# Altium PCB PCB1.PcbDoc
Units mm, origin at the board's own origin, x right, y up, seen from the top; angles counter-clockwise.
Board outline 220 x 125 mm, 4 copper layers (Top Layer 1, Layer 1, Layer 2, Bottom Layer), stack 0.746 mm thick; 119 components, 85 nets, 372 pads, 627 vias.
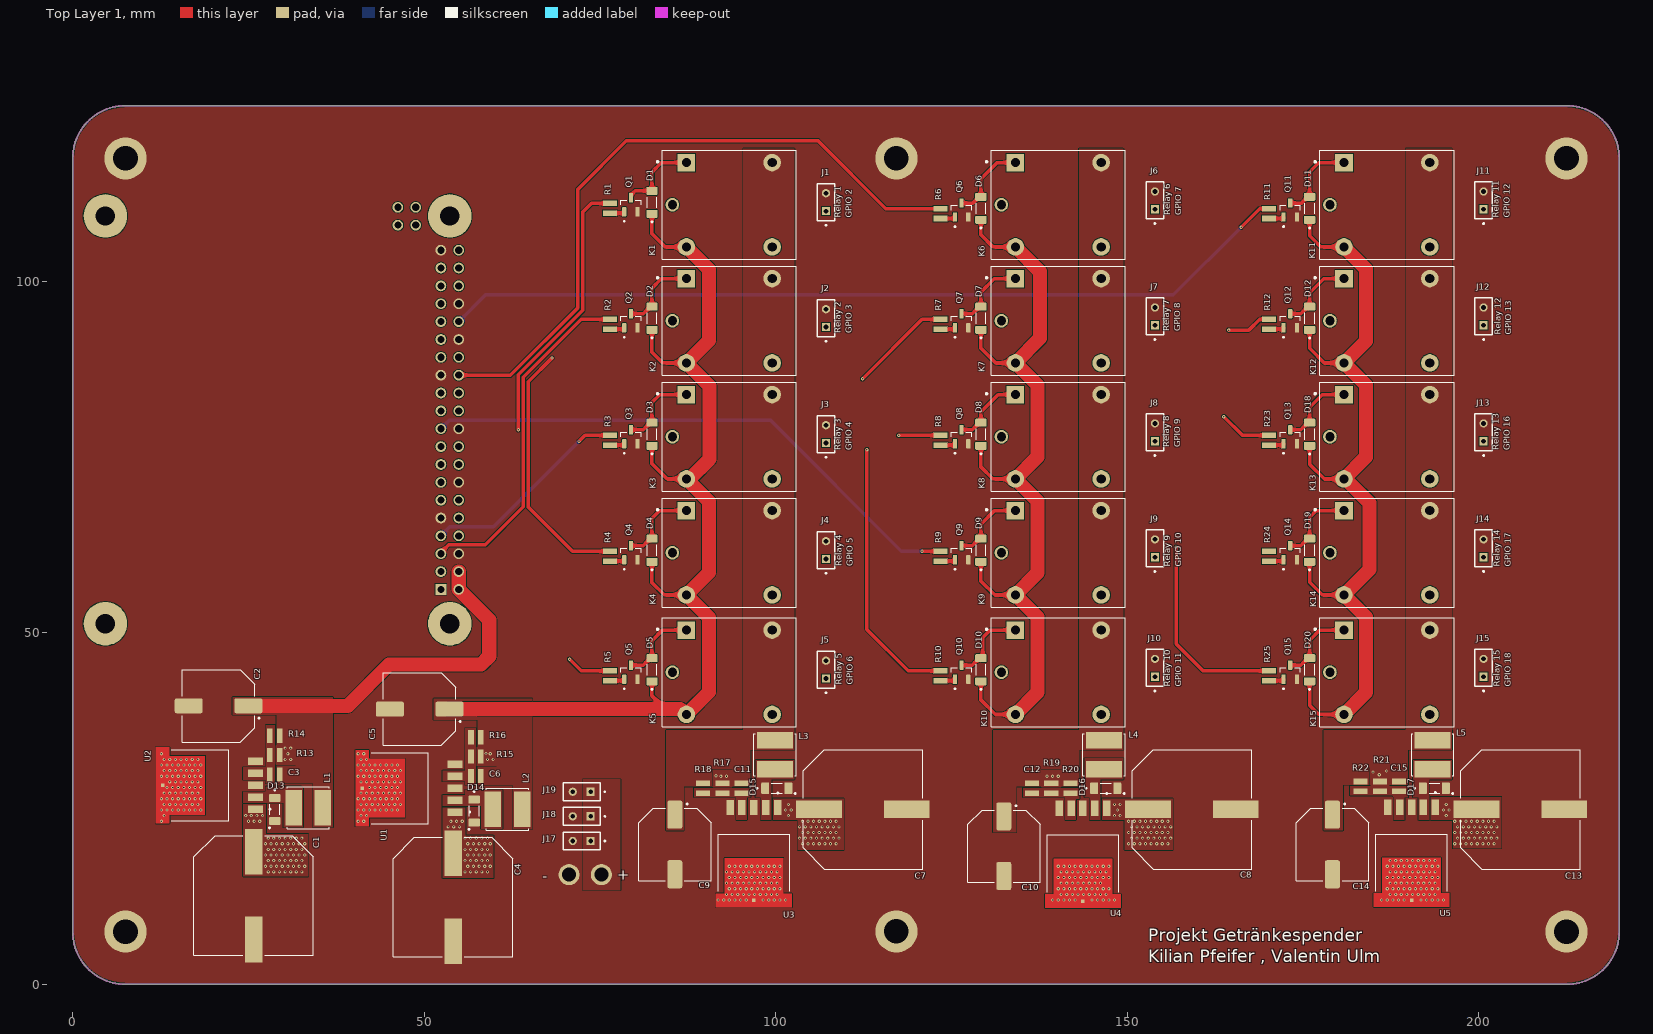
[diagram p0: Top Layer 1 view]
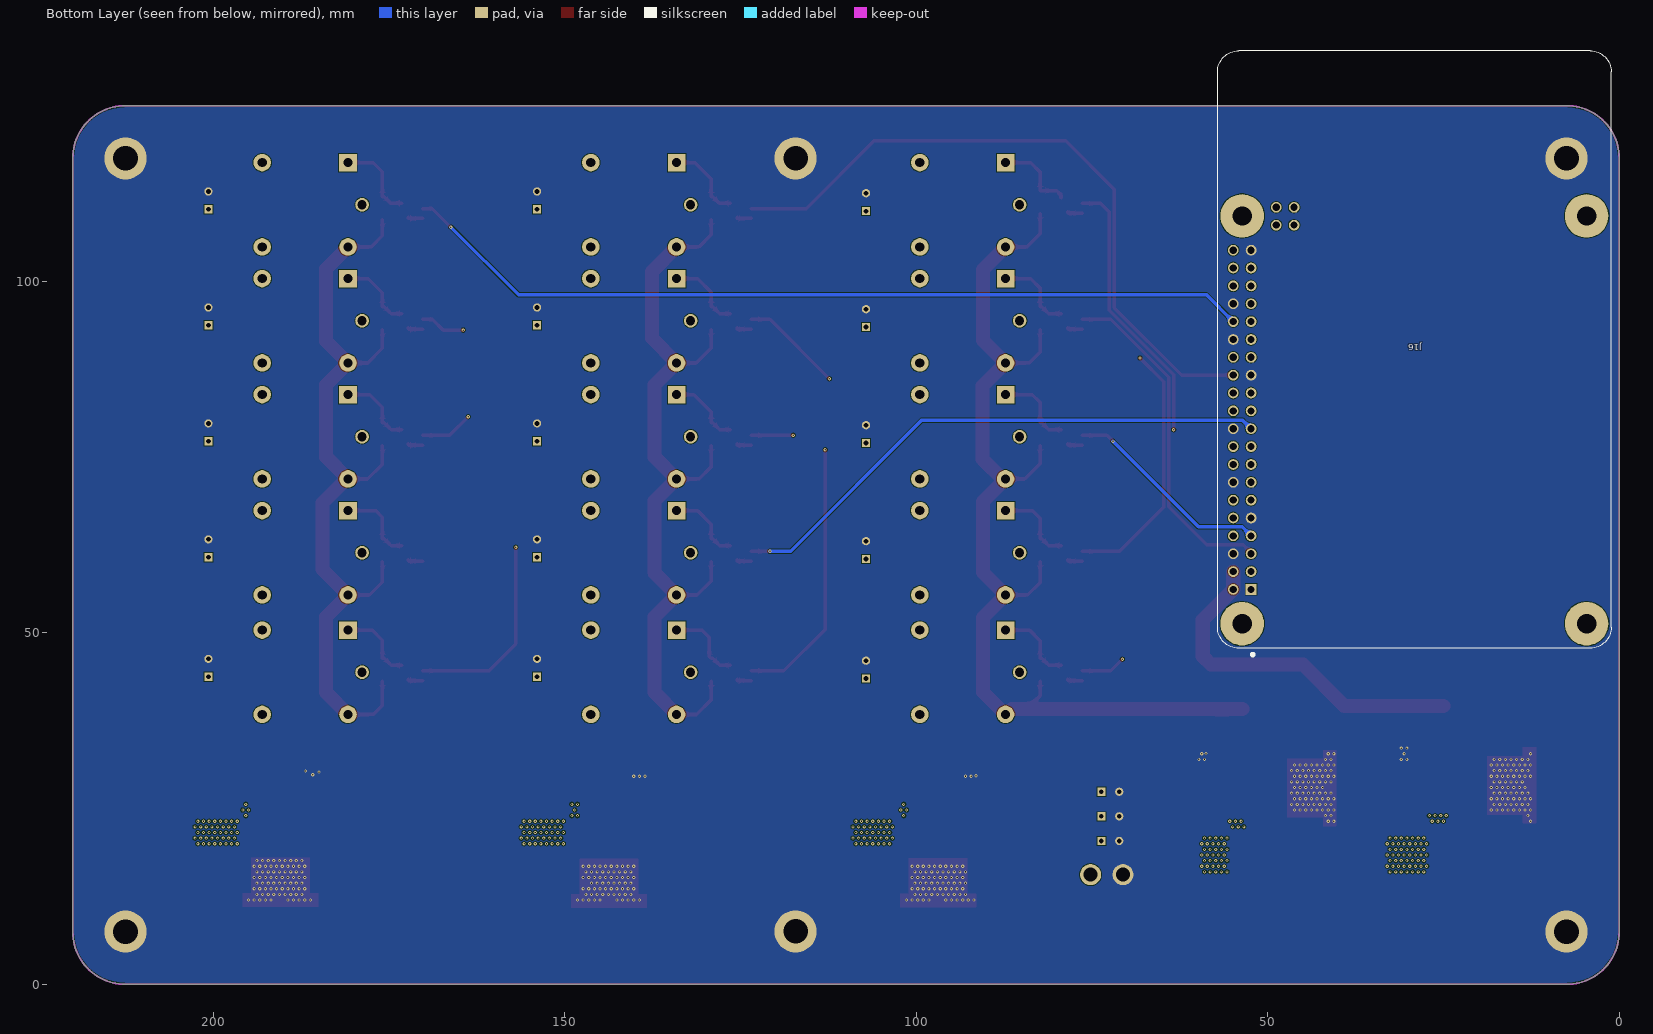
[diagram p1: Bottom Layer view, seen from below]
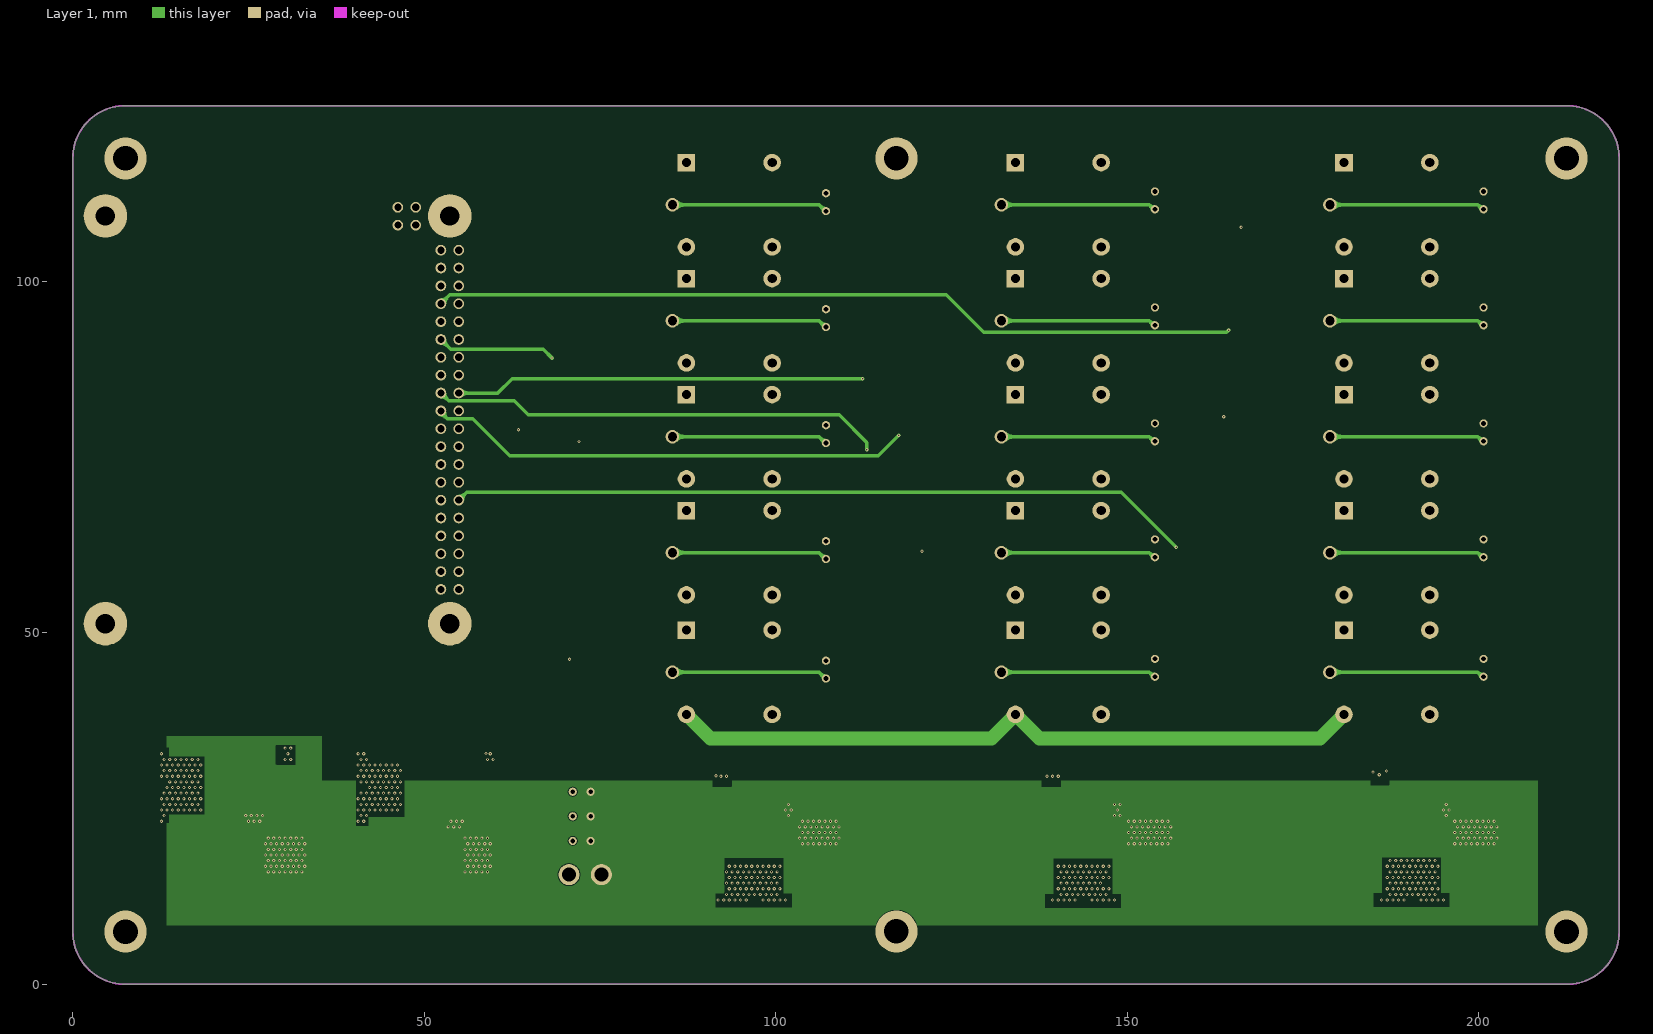
[diagram p2: Layer 1]
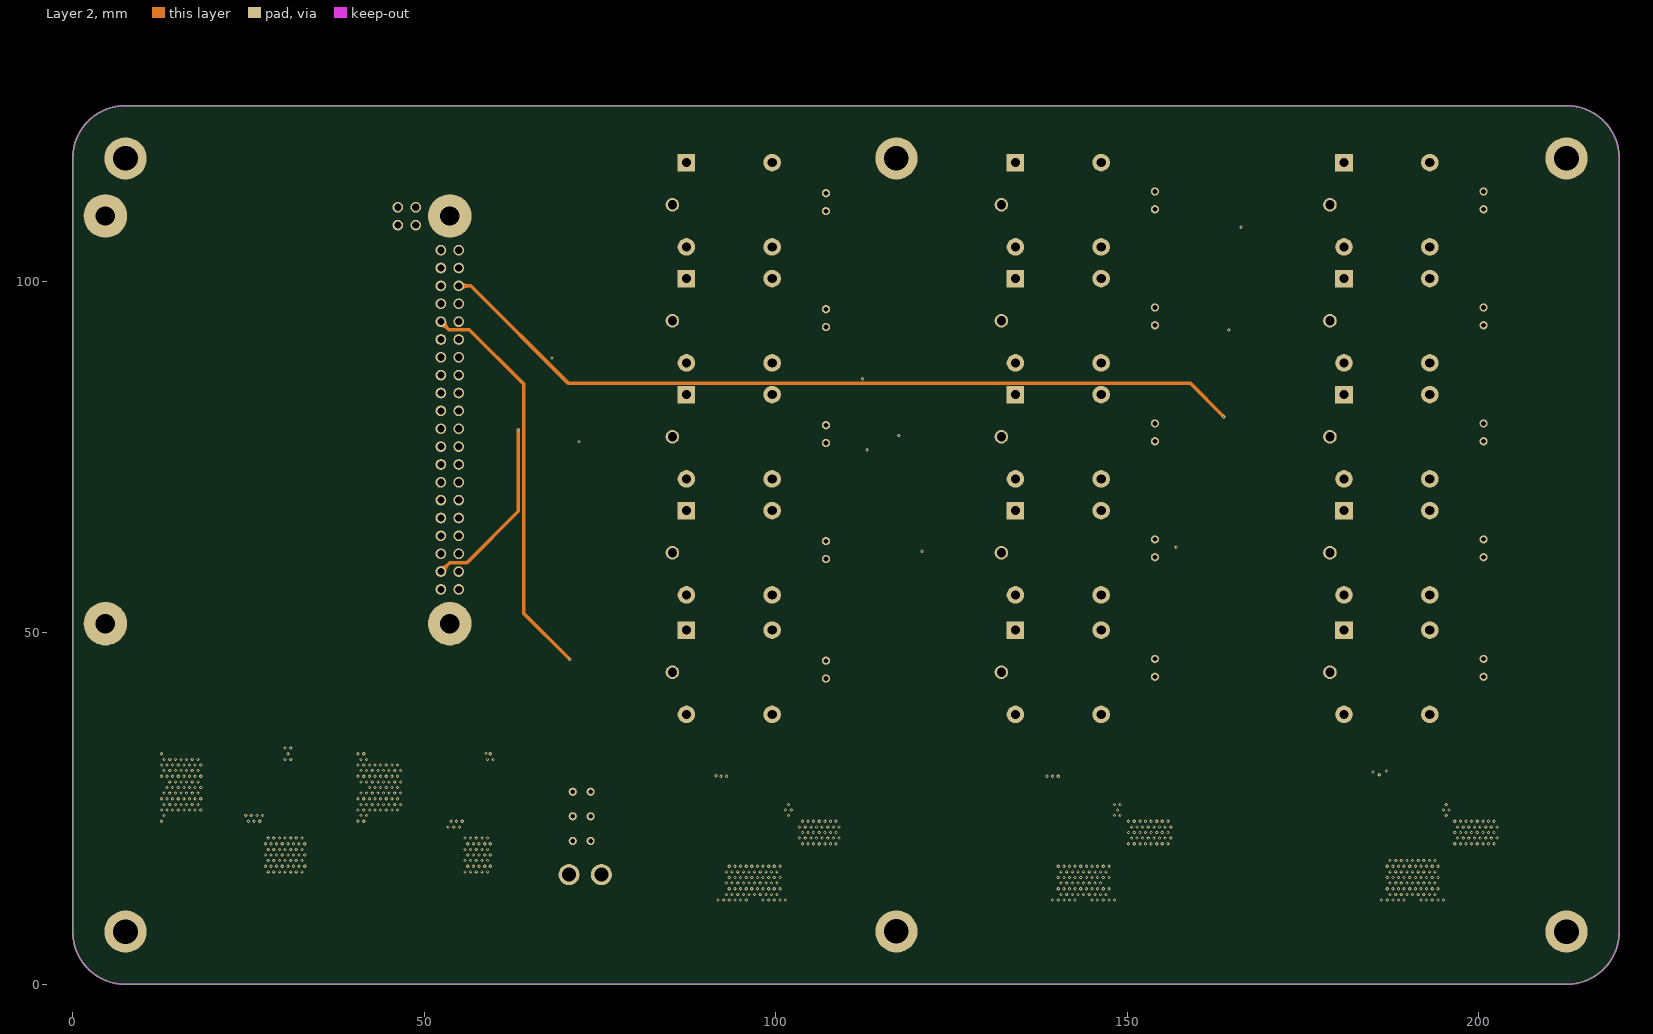
[diagram p3: Layer 2]
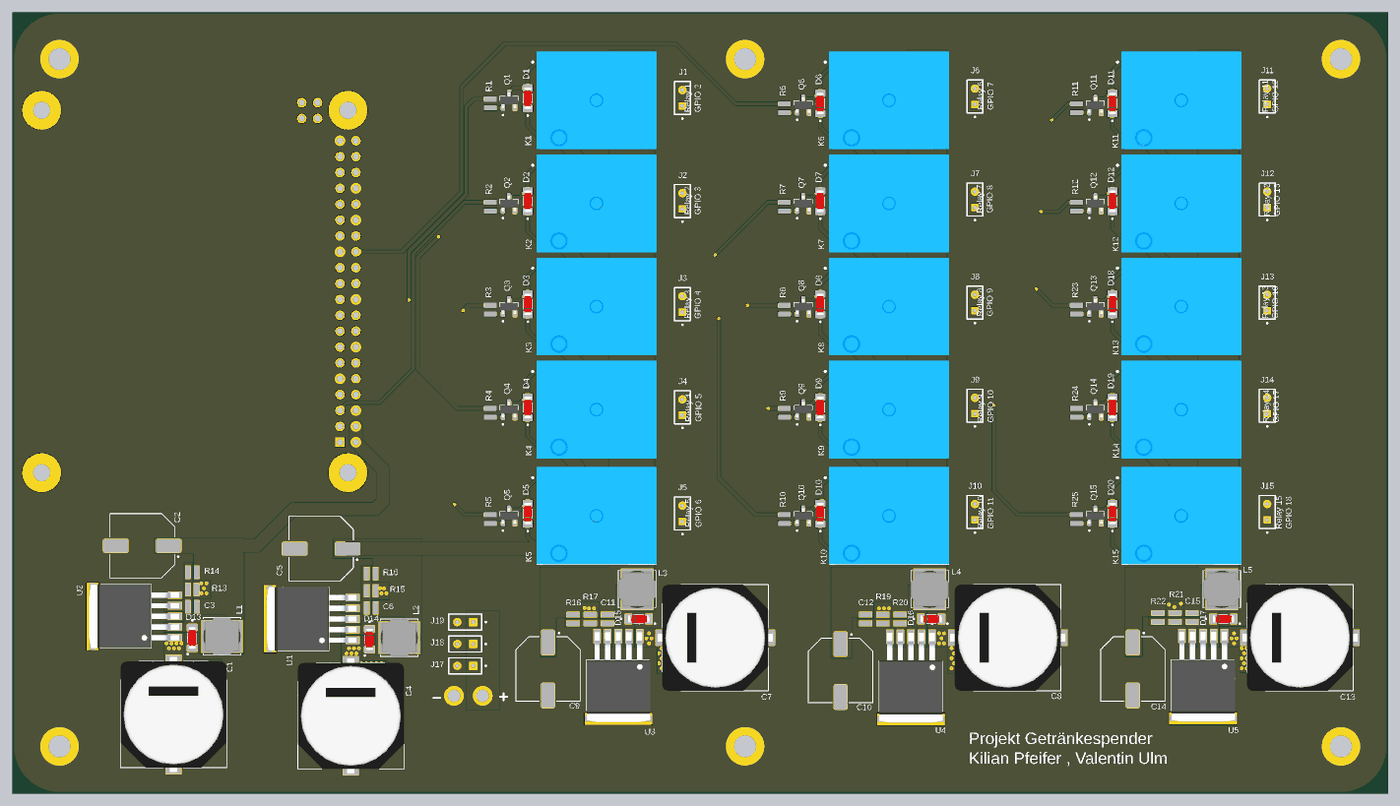
[diagram p4: 3D render of the assembled board from above, using the file's embedded part models]

## Layer stack, top to bottom
Top Solder: solder mask 0.0102, Solder Resist, Dk 3.5
Top Layer 1: signal copper 0.035
Dielectric 2: prepreg 0.0711, PP-006, Dk 4.1
Dielectric 3: prepreg 0.0711, PP-006, Dk 4.1
Layer 1: signal copper 0.0356
Dielectric 1: dielectric 0.32, FR-4, Dk 4.8
Layer 2: signal copper 0.0356
Dielectric 4: prepreg 0.0711, PP-006, Dk 4.1
Dielectric 5: prepreg 0.0711, PP-006, Dk 4.1
Bottom Layer: signal copper 0.035
Bottom Solder: solder mask 0.0102, Solder Resist, Dk 3.5

## Board outline
0,7.5 ccw(c7.5,7.5) 7.5,0 212.5,0 ccw(c212.5,7.5) 220,7.5 220,117.5 ccw(c212.5,117.5) 212.5,125 7.5,125 ccw(c7.5,117.5) 0,117.5

## Design rules (kind name [scope] priority, off if disabled: settings)
BoardOutlineClearance [All] p1: gap=0.2 ignorepadtopadclearanceinfootprint=FALSE
Clearance [All] p1: gap=0.102 ignorepadtopadclearanceinfootprint=FALSE except(0.127: Arc-Via Track-Via SMDPad-Via THPad-Via Via-Via Via-Fill Via-Poly Via-Region Via-Text; 0.25: Arc-Hole Track-Hole SMDPad-Hole THPad-Hole Via-Hole Fill-Hole Poly-Hole Region-Hole Text-Hole)
ComponentClearance [All] p1: gap=0.102 collisioncheckmode=3 verticalgap=0.102 showdistances=TRUE
DiffPairsRouting [All] p1: maxlimit=0.102 minlimit=0.102 mostfreqgap=0.102 toplayer_minwidth=0.102 toplayer_maxwidth=1816.048 toplayer_prefwidth=0.102 midlayer2_minwidth=0.102 midlayer2_maxwidth=1816.048 midlayer2_prefwidth=0.102 midlayer3_minwidth=0.102 midlayer3_maxwidth=1816.048 midlayer3_prefwidth=0.102 bottomlayer_minwidth=0.102 bottomlayer_maxwidth=1816.048 bottomlayer_prefwidth=0.102 maxuncoupledlength=12.7
Height [All] p1: minheight=0 maxheight=1816.048 prefheight=12.7
HoleSize [All] p1: absolutevalues=TRUE maxlimit=6.3 minlimit=0.2 maxpercent=80.000 minpercent=20.000
HoleToHoleClearance [All] p1: gap=0.25 allowstackedmicrovias=FALSE
MinimumAnnularRing [All] p1: minimumring=0.076
MinimumSolderMaskSliver [All] p1: minsoldermaskwidth=0
PlaneClearance [All] p1: clearance=0.102
PlaneConnect PlaneConnectPowerPads [InPadClass('PowerPads')] p1: planeconnectstyle=Direct reliefexpansion=0.508 reliefentries=4 reliefconductorwidth=0.254 reliefairgap=0.254
PlaneConnect [All] p2: pad.planeconnectstyle=Relief pad.reliefexpansion=0.3 pad.reliefentries=4 pad.reliefconductorwidth=0.102 pad.reliefairgap=0.102 via.planeconnectstyle=Direct via.reliefexpansion=0.3 via.reliefentries=4 via.reliefconductorwidth=0.127 via.reliefairgap=0.127
PolygonConnect PolygonConnectPowerPads [All vs (InPadClass('PowerPads'))] p1: connectstyle=Direct reliefconductorwidth=0.254 reliefentries=4 polygonreliefangle="90 Angle" airgapwidth=0.254
PolygonConnect [All] p2: connectstyle=Direct reliefconductorwidth=0.102 reliefentries=4 polygonreliefangle="90 Angle" airgapwidth=0.102
RoutingVias [All] p1: holewidth=0.2 width=0.45 viastyle="Through Hole" minholewidth=0.2 minwidth=0.45 maxholewidth=6.3 maxwidth=6.55
SilkToSilkClearance [All] p1: silktosilkclearance=0
SilkToSolderMaskClearance [IsPad] p1: minsilkscreentomaskgap=0.102 clearancetoexposedcopper=TRUE
SolderMaskExpansion [All] p1: expansion=0.075 istentingtop=FALSE
Width [All] p1: maxlimit=1816.048 minlimit=0.102 preferedwidth=0.5
20 further rules are at their usual default settings.

## Classes and differential pairs
component class Relay: D1 D2 D3 D4 D5 D6 D7 D8 D9 D10 D11 D12 D18 D19 D20 J1 J2 J3 J4 J5 J6 J7 J8 J9 J10 J11 J12 J13 J14 J15 K1 K2 K3 K4 K5 K6 K7 K8 K9 K10 K11 K12 K13 K14 K15 Q1 Q2 Q3 Q4 Q5 Q6 Q7 Q8 Q9 Q10 Q11 Q12 Q13 Q14 Q15 R1 R2 R3 R4 R5 R6 R7 R8 R9 R10 R11 R12 R23 R24 R25
component class Relay_2+Pi: J16 J17 J18 J19
component class Buck-converter: C1 C2 C3 C4 C5 C6 C7 C8 C9 C10 C11 C12 C13 C14 C15 D13 D14 D15 D16 D17 L1 L2 L3 L4 L5 R13 R14 R15 R16 R17 R18 R19 R20 R21 R22 U1 U2 U3 U4 U5

## Components (designator, comment, footprint, x,y, rotation, side; value= is the part's Value field where it differs from the comment)
C1 "Cap" CAP_EEEFK1H471AM 25.735,12.618 r270 top value=470uF
C2 "Cap" CAPAE1030X1080N_UWT1H221MNL1GS 20.735,39.618 r180 top value=220uF
C3 "Cap" RES_ERJB3CFR15V 28.735,29.868 r0 top value=680uF
C4 "Cap" CAP_EEEFK1H471AM 54.1,12.4 r270 top value=470uF
C5 "Cap" CAPAE1030X1080N_UWT1H221MNL1GS 49.35,39.15 r180 top value=220uF
C6 "Cap" RES_ERJB3CFR15V 57.35,29.65 r0 top value=680uF
C7 "Cap" CAP_EEEFK1H471AM 112.4,24.9 r0 top value=470uF
C8 "Cap" CAP_EEEFK1H471AM 159.2,24.9 r0 top value=470uF
C9 "Cap" CAPAE1030X1080N_UWT1H221MNL1GS 85.65,19.9 r270 top value=220uF
C10 "Cap" CAPAE1030X1080N_UWT1H221MNL1GS 132.45,19.65 r270 top value=220uF
C11 "Cap" RES_ERJB3CFR15V 95.15,27.9 r90 top value=680uF
C12 "Cap" RES_ERJB3CFR15V 136.45,27.9 r90 top value=680uF
C13 "Cap" CAP_EEEFK1H471AM 205.95,24.9 r0 top value=470uF
C14 "Cap" CAPAE1030X1080N_UWT1H221MNL1GS 179.2,19.9 r270 top value=220uF
C15 "Cap" RES_ERJB3CFR15V 188.7,28.15 r90 top value=680uF
D1 "FDLL4148" DIOMELF3414N 82.4,111.255 r90 top
D2 "FDLL4148" DIOMELF3414N 82.4,94.755 r90 top
D3 "FDLL4148" DIOMELF3414N 82.4,78.255 r90 top
D4 "FDLL4148" DIOMELF3414N 82.4,61.755 r90 top
D5 "FDLL4148" DIOMELF3414N 82.4,44.755 r90 top
D6 "FDLL4148" DIOMELF3414N 129.2,110.4 r90 top
D7 "FDLL4148" DIOMELF3414N 129.2,94.755 r90 top
D8 "FDLL4148" DIOMELF3414N 129.2,78.255 r90 top
D9 "FDLL4148" DIOMELF3414N 129.2,61.755 r90 top
D10 "FDLL4148" DIOMELF3414N 129.2,44.755 r90 top
D11 "FDLL4148" DIOMELF3414N 175.95,110.4 r90 top
D12 "FDLL4148" DIOMELF3414N 175.95,94.755 r90 top
D13 "FDLL4148" DIOMELF3414N 28.735,24.868 r270 top
D14 "FDLL4148" DIOMELF3414N 57.1,24.65 r270 top
D15 "FDLL4148" DIOMELF3414N 100.15,27.9 r0 top
D16 "FDLL4148" DIOMELF3414N 146.95,27.9 r0 top
D17 "FDLL4148" DIOMELF3414N 193.7,27.9 r0 top
D18 "FDLL4148" DIOMELF3414N 175.95,78.255 r90 top
D19 "FDLL4148" DIOMELF3414N 175.95,61.755 r90 top
D20 "FDLL4148" DIOMELF3414N 175.95,44.755 r90 top
J1 "BBS-102-T-A" SAMTEC_BBS-102-T-A 107.15,111.275 r90 top
J2 "BBS-102-T-A" SAMTEC_BBS-102-T-A 107.15,94.775 r90 top
J3 "BBS-102-T-A" SAMTEC_BBS-102-T-A 107.15,78.275 r90 top
J4 "BBS-102-T-A" SAMTEC_BBS-102-T-A 107.15,61.775 r90 top
J5 "BBS-102-T-A" SAMTEC_BBS-102-T-A 107.15,44.775 r90 top
J6 "BBS-102-T-A" SAMTEC_BBS-102-T-A 153.95,111.525 r90 top
J7 "BBS-102-T-A" SAMTEC_BBS-102-T-A 153.95,95.025 r90 top
J8 "BBS-102-T-A" SAMTEC_BBS-102-T-A 153.95,78.525 r90 top
J9 "BBS-102-T-A" SAMTEC_BBS-102-T-A 153.95,62.025 r90 top
J10 "BBS-102-T-A" SAMTEC_BBS-102-T-A 153.95,45.025 r90 top
J11 "BBS-102-T-A" SAMTEC_BBS-102-T-A 200.7,111.525 r90 top
J12 "BBS-102-T-A" SAMTEC_BBS-102-T-A 200.7,95.025 r90 top
J13 "BBS-102-T-A" SAMTEC_BBS-102-T-A 200.7,78.525 r90 top
J14 "BBS-102-T-A" SAMTEC_BBS-102-T-A 200.7,62.025 r90 top
J15 "BBS-102-T-A" SAMTEC_BBS-102-T-A 200.7,45.025 r90 top
J16 "SBH11-PBPC-D20-RA-BK" MODULE_RASPBERRY_PI_3_MODEL_B+ 29.143,90.31 r90 bottom
J17 "BBS-102-T-A" SAMTEC_BBS-102-T-A 72.4,20.4 r180 top
J18 "BBS-102-T-A" SAMTEC_BBS-102-T-A 72.4,23.9 r180 top
J19 "BBS-102-T-A" SAMTEC_BBS-102-T-A 72.4,27.4 r180 top
K1 "SRD-05VDC-SL-C" RELAY_SRD-05VDC-SL-C 93.4,110.9 r0 top
K2 "SRD-05VDC-SL-C" RELAY_SRD-05VDC-SL-C 93.4,94.4 r0 top
K3 "SRD-05VDC-SL-C" RELAY_SRD-05VDC-SL-C 93.4,77.9 r0 top
K4 "SRD-05VDC-SL-C" RELAY_SRD-05VDC-SL-C 93.4,61.4 r0 top
K5 "SRD-05VDC-SL-C" RELAY_SRD-05VDC-SL-C 93.4,44.4 r0 top
K6 "SRD-05VDC-SL-C" RELAY_SRD-05VDC-SL-C 140.2,110.9 r0 top
K7 "SRD-05VDC-SL-C" RELAY_SRD-05VDC-SL-C 140.2,94.4 r0 top
K8 "SRD-05VDC-SL-C" RELAY_SRD-05VDC-SL-C 140.2,77.9 r0 top
K9 "SRD-05VDC-SL-C" RELAY_SRD-05VDC-SL-C 140.2,61.4 r0 top
K10 "SRD-05VDC-SL-C" RELAY_SRD-05VDC-SL-C 140.2,44.4 r0 top
K11 "SRD-05VDC-SL-C" RELAY_SRD-05VDC-SL-C 186.95,110.9 r0 top
K12 "SRD-05VDC-SL-C" RELAY_SRD-05VDC-SL-C 186.95,94.4 r0 top
K13 "SRD-05VDC-SL-C" RELAY_SRD-05VDC-SL-C 186.95,77.9 r0 top
K14 "SRD-05VDC-SL-C" RELAY_SRD-05VDC-SL-C 186.95,61.4 r0 top
K15 "SRD-05VDC-SL-C" RELAY_SRD-05VDC-SL-C 186.95,44.4 r0 top
L1 "MLF2012C680KT000" IND_SRN6045TA-680M 33.485,25.118 r0 top
L2 "MLF2012C680KT000" IND_SRN6045TA-680M 61.85,24.9 r0 top
L3 "MLF2012C680KT000" IND_SRN6045TA-680M 99.9,32.65 r90 top
L4 "MLF2012C680KT000" IND_SRN6045TA-680M 146.7,32.65 r90 top
L5 "MLF2012C680KT000" IND_SRN6045TA-680M 193.45,32.65 r90 top
Q1 "BC817-40" SOT95P240X120-3N 79.4,110.9 r90 top
Q2 "BC817-40" SOT95P240X120-3N 79.4,94.4 r90 top
Q3 "BC817-40" SOT95P240X120-3N 79.4,77.9 r90 top
Q4 "BC817-40" SOT95P240X120-3N 79.4,61.4 r90 top
Q5 "BC817-40" SOT95P240X120-3N 79.4,44.4 r90 top
Q6 "BC817-40" SOT95P240X120-3N 126.45,110.15 r90 top
Q7 "BC817-40" SOT95P240X120-3N 126.45,94.4 r90 top
Q8 "BC817-40" SOT95P240X120-3N 126.45,77.9 r90 top
Q9 "BC817-40" SOT95P240X120-3N 126.45,61.4 r90 top
Q10 "BC817-40" SOT95P240X120-3N 126.45,44.4 r90 top
Q11 "BC817-40" SOT95P240X120-3N 173.2,110.15 r90 top
Q12 "BC817-40" SOT95P240X120-3N 173.2,94.4 r90 top
Q13 "BC817-40" SOT95P240X120-3N 173.2,77.9 r90 top
Q14 "BC817-40" SOT95P240X120-3N 173.2,61.4 r90 top
Q15 "BC817-40" SOT95P240X120-3N 173.2,44.4 r90 top
R1 "ERJB3CFR15V" RES_ERJB3CFR15V 76.4,110.4 r90 top value=1k
R2 "ERJB3CFR15V" RES_ERJB3CFR15V 76.4,93.9 r90 top value=1k
R3 "ERJB3CFR15V" RES_ERJB3CFR15V 76.4,77.4 r90 top value=1k
R4 "ERJB3CFR15V" RES_ERJB3CFR15V 76.4,60.9 r90 top value=1k
R5 "ERJB3CFR15V" RES_ERJB3CFR15V 76.4,43.9 r90 top value=1k
R6 "ERJB3CFR15V" RES_ERJB3CFR15V 123.45,109.65 r90 top value=1k
R7 "ERJB3CFR15V" RES_ERJB3CFR15V 123.45,93.9 r90 top value=1k
R8 "ERJB3CFR15V" RES_ERJB3CFR15V 123.45,77.4 r90 top value=1k
R9 "ERJB3CFR15V" RES_ERJB3CFR15V 123.45,60.9 r90 top value=1k
R10 "ERJB3CFR15V" RES_ERJB3CFR15V 123.45,43.9 r90 top value=1k
R11 "ERJB3CFR15V" RES_ERJB3CFR15V 170.2,109.65 r90 top value=1k
R12 "ERJB3CFR15V" RES_ERJB3CFR15V 170.2,93.9 r90 top value=1k
R13 "Res1" RES_ERJB3CFR15V 28.735,32.618 r180 top value=1K
R14 "Res1" RES_ERJB3CFR15V 28.735,35.368 r180 top value=3,1k
R15 "Res1" RES_ERJB3CFR15V 57.35,32.4 r180 top value=1K
R16 "Res1" RES_ERJB3CFR15V 57.35,35.15 r180 top value=3,1k
R17 "Res1" RES_ERJB3CFR15V 92.4,27.9 r270 top value=1K
R18 "Res1" RES_ERJB3CFR15V 89.65,27.9 r270 top value=4,7k
R19 "Res1" RES_ERJB3CFR15V 139.2,27.9 r270 top value=1K
R20 "Res1" RES_ERJB3CFR15V 141.95,27.9 r270 top value=4,7k
R21 "Res1" RES_ERJB3CFR15V 185.95,28.15 r270 top value=1K
R22 "Res1" RES_ERJB3CFR15V 183.2,28.15 r270 top value=4,7k
R23 "ERJB3CFR15V" RES_ERJB3CFR15V 170.2,77.4 r90 top value=1k
R24 "ERJB3CFR15V" RES_ERJB3CFR15V 170.2,60.9 r90 top value=1k
R25 "ERJB3CFR15V" RES_ERJB3CFR15V 170.2,43.9 r90 top value=1k
U1 "LM2596S-3.3" VREG_LM2596SX-5.0_NOPB 47.85,27.9 r180 top
U2 "LM2596S-3.3" VREG_LM2596SX-5.0_NOPB 19.44,28.318 r180 top
U3 "LM2596S-3.3" VREG_LM2596SX-5.0_NOPB 96.9,18.605 r270 top
U4 "LM2596S-3.3" VREG_LM2596SX-5.0_NOPB 143.711,18.515 r270 top
U5 "LM2596S-3.3" VREG_LM2596SX-5.0_NOPB 190.45,18.65 r270 top

## Footprints (in the part's own frame and the unit in brackets; to place one, negate y for a bottom-side part, rotate by r counter-clockwise, add the part's x,y. Pads: shape width x height; smd on the part's side, far side on the other; paste and mask are expansions set on the pad)
CAP_EEEFK1H471AM [mm]
  rect 6.5x2.5 smd: 1(-6.25,0) 2(6.25,0)
  silkscreen extent -9.75,-8.5 8.5,8.5, body extent -9.2,-8.5 9.2,8.5, height 16.5
CAPAE1030X1080N_UWT1H221MNL1GS [mm]
  rrect25% 3.99x2.12 smd: 1(-4.24,0) 2(4.24,0)
  silkscreen extent -5.85,-5.15 5.15,5.15
DIOMELF3414N [mm]
  rrect25% 1.14x1.63 smd: A(1.64,0) C(-1.64,0)
  silkscreen extent -2.89,-0.7 0.75,0.7, body extent -1.7,-0.7 1.7,0.7, height 1.4
IND_SRN6045TA-680M [mm]
  rect 2.35x5.1 smd: 1(-2.075,0) 2(2.075,0)
  silkscreen extent -3,-3 3,3, body extent -3,-3 3,3, height 4.5
MODULE_RASPBERRY_PI_3_MODEL_B+ [mil]
  rect 60x60 / inner round 60 / far side rect 60x60 hole 40: 1(-1343.7,914.57)
  round 60 hole 40: 2(-1343.7,1014.57) 3(-1243.7,914.57) 4(-1243.7,1014.57) 5(-1143.7,914.57) 6(-1143.7,1014.57) 7(-1043.7,914.57) 8(-1043.7,1014.57) 9(-943.7,914.57) 10(-943.7,1014.57) 11(-843.7,914.57) 12(-843.7,1014.57) 13(-743.7,914.57) 14(-743.7,1014.57) 15(-643.7,914.57) 16(-643.7,1014.57) 17(-543.7,914.57) 18(-543.7,1014.57) 19(-443.7,914.57) 20(-443.7,1014.57) 21(-343.7,914.57) 22(-343.7,1014.57) 23(-243.7,914.57) 24(-243.7,1014.57) 25(-143.7,914.57) 26(-143.7,1014.57) 27(-43.7,914.57) 28(-43.7,1014.57) 29(56.3,914.57) 30(56.3,1014.57) 31(156.3,914.57) 32(156.3,1014.57) 33(256.3,914.57) 34(256.3,1014.57) 35(356.3,914.57) 36(356.3,1014.57) 37(456.3,914.57) 38(456.3,1014.57) 39(556.3,914.57) 40(556.3,1014.57) 41(796.46,673.5) 42(796.46,773.5) 43(696.46,673.5) 44(696.46,773.5)
  round 244.09 hole 108.27: S1(-1535.43,964.57) S2(748.03,964.57) S3(748.03,-964.57) S4(-1535.43,-964.57)
  silkscreen extent -1717,-1102 1673,1102
RELAY_SRD-05VDC-SL-C [mm]
  rect 2.5x2.5 hole 1.32: A1(-6.1,6)
  round 2.5 hole 1.32: A2(-6.1,-6) NC(6.1,6) NO(6.1,-6)
  round 1.935 hole 1.29: COM(-8.1,0)
  silkscreen extent -10.3,-7.75 9.55,7.75, body extent -9.6,-7.8 9.6,7.8, height 15.8
RES_ERJB3CFR15V [mm]
  rect 0.8x2 smd: 1(-0.7,0) 2(0.7,0)
SAMTEC_BBS-102-T-A [mm]
  rect 1.168x1.168 / inner round 1.168 / far side rect 1.168x1.168 hole 0.66: 01(-1.27,0)
  round 1.168 hole 0.66: 02(1.27,0)
  silkscreen extent -3.39,-1.27 2.64,1.27
SOT95P240X120-3N [mm]
  rrect25% 1.32x0.6 smd: 1(-1,0.95) 2(-1,-0.95) 3(1,0)
  silkscreen extent -2.45,-1.45 0.65,1.45, body extent -1.2,-1.45 1.2,1.45, height 1.2
VREG_LM2596SX-5.0_NOPB [mm]
  rect 2.16x1.07 smd: 1(-6.545,3.4) 2(-6.545,1.7) 3(-6.545,0) 4(-6.545,-1.7) 5(-6.545,-3.4)
  rect 0.5x0.5 smd paste-1 mask+0: 6(6.67,0)
  Top Layer 1 region: 7.625,-5.4 5.715,-5.4 5.715,-4.165 0.635,-4.165 0.635,4.165 5.715,4.165 5.715,5.4 7.625,5.4
  silkscreen extent -8.72,-5.08 5.39,5.08, body extent -7.18,-5.08 7.18,5.08, height 4.65

## Part data
C1 C2 C4 C5 C7 C8 C9 C10 C13 C14: library part ELKO, "Elko"
C3 C6 C11 C12 C15: library part KO, "Kondensator"
D1 D2 D3 D4 D5 D6 D7 D8 D9 D10 D11 D12 D13 D14 D15 D16 D17 D18 D19 D20: "Diode Standard 100 V 200mA Surface Mount SOD-80", Package="SOD-80-2 ON Semiconductor", Check_prices=https://www.snapeda.com/parts/FDLL4148/Onsemi/view-part/?ref=eda, MF="ON Semiconductor", MP=FDLL4148, SnapEDA_Link=https://www.snapeda.com/parts/FDLL4148/Onsemi/view-part/?ref=snap
J1 J2 J3 J4 J5 J6 J7 J8 J9 J10 J11 J12 J13 J14 J15 J17 J18 J19: "HEADER, 2.54MM, PCB, 1X2 POSITION; Product Range:BBS Series; No. of Contacts:2Contacts; Gender:Header; Pitch Spacing:2.54mm; Contact Termination Type:Through Hole; No. of Rows:1Rows; Contact Plating:Tin Plated Contacts RoHS Compliant: Yes", Package=None, Check_prices=https://www.snapeda.com/parts/BBS102TA/Samtec/view-part/?ref=eda, MF=Samtec, MP=BBS102TA, SnapEDA_Link=https://www.snapeda.com/parts/BBS102TA/Samtec/view-part/?ref=snap
J16: "Connector Header Through Hole, Right Angle 40 position 0.100 (2.54mm)", Package=None, Check_prices=https://www.snapeda.com/parts/SBH11-PBPC-D20-RA-BK/Sullins+Connector+Solutions/view-part/?ref=eda, MF="Sullins Connector", MP=SBH11-PBPC-D20-RA-BK, SnapEDA_Link=https://www.snapeda.com/parts/SBH11-PBPC-D20-RA-BK/Sullins+Connector+Solutions/view-part/?ref=snap
K1 K2 K3 K4 K5 K6 K7 K8 K9 K10 K11 K12 K13 K14 K15: "5V Trigger Relay Module For Arduino And Raspberry Pi 5V Trigger Relay Module For Arduino And Raspberry Pi", Package="NON STANDARD-5 Songle Relay", Availability="Not in stock", Check_prices=https://www.snapeda.com/parts/SRD-05VDC-SL-C/Songle+Relay/view-part/?ref=eda, MF="Songle Relay", MP=SRD-05VDC-SL-C, Price=None, SnapEDA_Link=https://www.snapeda.com/parts/SRD-05VDC-SL-C/Songle+Relay/view-part/?ref=snap
L1 L2 L3 L4 L5: "68ÂµH Shielded Multilayer Inductor 2mA 2.9Ohm Max 0805 (2012 Metric)", Package=None, Availability=Unavailable, MF="{'manufacturer': u'TDK Corporation'}", MP=MLF2012C680KT000, Price=None
Q1 Q2 Q3 Q4 Q5 Q6 Q7 Q8 Q9 Q10 Q11 Q12 Q13 Q14 Q15: "BJT, SOT-23, 45V, 800mA, NPN, 0.31W, 150Â°C", Package="SOT-23 Diotec", Check_prices=https://www.snapeda.com/parts/BC817-40/Diotec/view-part/?ref=eda, MF="Diotec Semiconductor", MP=BC817-40, SnapEDA_Link=https://www.snapeda.com/parts/BC817-40/Diotec/view-part/?ref=snap
R1 R2 R3 R4 R5 R6 R7 R8 R9 R10 R11 R12 R23 R24 R25: Package=None, Availability=Unavailable, MP=ERJB3CFR15V, Price=None
R13 R14 R15 R16 R17 R18 R19 R20 R21 R22: "Resistor", LatestRevisionDate=17-Jul-2002, LatestRevisionNote="Re-released for DXP Platform.", PackageDescription="Axial Device, Thru-Hole; 2 Leads; 0.3 in Pin Spacing", PackageReference=AXIAL-0.3, Published=8-Jun-2000, Publisher="Altium Limited"
U1 U2 U3 U4 U5: "SIMPLE SWITCHERÂ® 4.5V to 40V, 3A Low Component Count Step-Down Regulator 5-DDPAK/TO-263", Package="TO-263-5 Texas Instruments", Check_prices=https://www.snapeda.com/parts/LM2596S-3.3/Texas+Instruments/view-part/?ref=eda, MF="Texas Instruments", MP=LM2596S-3.3, SnapEDA_Link=https://www.snapeda.com/parts/LM2596S-3.3/Texas+Instruments/view-part/?ref=snap

## Free pads (board coordinates)
  round 6 hole 3.5: 2(7.5,7.5) 3(7.5,117.5) 4(117.175,7.525) 4(117.175,117.5) 4(212.5,117.5) 5(212.5,7.5)
  round 3 hole 2: 6(70.6,15.6) 7(75.2,15.6)

## Via types
v1: diameter 0.45, hole 0.2, Top Layer 1 to Bottom Layer, 627 vias

## Nets (pads, with @x,y where several pads share a name; then routed paths per layer and width w, separated by ;. In a path a pad name is that pad's centre, name@x,y a point inside that pad or via, vN(x,y) a via of type N, cw(c..) or ccw(c..) an arc to the next point about the centre after c; other vN are vias at no path point)
GIO20: J16.38
GND: C1.2 C2.2 C4.2 C5.2 C7.2 C8.2 C9.2 C10.2 C13.2 C14.2 D13.A D14.A D15.A D16.A D17.A J1.02 J2.02 J3.02 J4.02 J5.02 J6.02 J7.02 J8.02 J9.02 J10.02 J11.02 J12.02 J13.02 J14.02 J15.02 J16.6 J16.9 J16.14 J16.20 J16.25 J16.30 J16.34 J16.39 J17.02 J18.02 J19.02 pad.2 pad.3 pad.4 pad.5 pad.6 Q1.2 Q2.2 Q3.2 Q4.2 Q5.2 Q6.2 Q7.2 Q8.2 Q9.2 Q10.2 Q11.2 Q12.2 Q13.2 Q14.2 Q15.2 R13.1 R15.1 R17.1 R19.1 R21.1 U1.3 U1.5 U1.6 U2.3 U2.5 U2.6 U3.3 U3.5 U3.6 U4.3 U4.5 U4.6 U5.3 U5.5 U5.6
  other v1: 91.8,12 92.6,12 93.4,12 94.2,12 95,12 95.8,12 98.2,12 99,12 99.8,12 100.6,12 101.4,12 139.4,12 140.2,12 141.001,12 141.801,12 142.601,12 145.001,12 145.801,12 146.601,12 147.401,12 148.201,12 186.201,12 187.001,12 187.801,12 188.601,12 189.401,12 191.801,12 192.601,12 193.401,12 194.201,12 195.001,12 93,12.8 93.8,12.8 94.6,12.8 95.4,12.8 96.2,12.8 97,12.8 97.8,12.8 98.6,12.8 99.4,12.8 100.2,12.8 140.601,12.8 141.401,12.8 142.201,12.8 143.001,12.8 143.801,12.8 144.601,12.8 145.401,12.8 146.201,12.8 147.001,12.8 187.401,12.8 188.201,12.8 189.001,12.8 189.801,12.8 190.601,12.8 191.401,12.8 192.201,12.8 193.001,12.8 193.801,12.8 93.4,13.6 94.2,13.6 95,13.6 95.8,13.6 96.6,13.6 97.4,13.6 98.2,13.6 99,13.6 99.8,13.6 100.6,13.6 140.2,13.6 141.001,13.6 141.801,13.6 142.601,13.6 143.401,13.6 144.201,13.6 145.001,13.6 145.801,13.6 146.601,13.6 147.401,13.6 187.001,13.6 187.801,13.6 188.601,13.6 189.401,13.6 190.201,13.6 191.001,13.6 191.801,13.6 192.601,13.6 193.401,13.6 194.201,13.6 93,14.4 93.8,14.4 94.6,14.4 95.4,14.4 96.2,14.4 97,14.4 97.8,14.4 98.6,14.4 99.4,14.4 100.2,14.4 140.601,14.4 141.401,14.4 142.201,14.4 143.001,14.4 143.801,14.4 144.601,14.4 145.401,14.4 146.201,14.4 187.401,14.4 188.201,14.4 189.001,14.4 189.801,14.4 190.601,14.4 191.401,14.4 192.201,14.4 193.001,14.4 193.801,14.4 93.4,15.2 94.2,15.2 95,15.2 95.8,15.2 96.6,15.2 97.4,15.2 98.2,15.2 99,15.2 99.8,15.2 100.6,15.2 140.2,15.2 141.001,15.2 141.801,15.2 142.601,15.2 143.401,15.2 144.201,15.2 145.001,15.2 145.801,15.2 146.601,15.2 147.401,15.2 187.001,15.2 187.801,15.2 188.601,15.2 189.401,15.2 190.201,15.2 191.001,15.2 191.801,15.2 192.601,15.2 193.401,15.2 194.201,15.2 93,16 93.8,16 94.6,16 95.4,16 96.2,16 97,16 97.8,16 98.6,16 99.4,16 100.2,16 140.601,16 141.401,16 142.201,16 143.001,16 143.801,16 144.601,16 145.401,16 146.201,16 147.001,16 187.401,16 188.201,16 189.001,16 189.801,16 190.601,16 191.401,16 192.201,16 193.001,16 193.801,16 93.4,16.8 94.2,16.8 95,16.8 95.8,16.8 96.6,16.8 97.4,16.8 98.2,16.8 99,16.8 99.8,16.8 100.6,16.8 140.2,16.8 141.001,16.8 141.801,16.8 142.601,16.8 143.401,16.8 144.201,16.8 145.001,16.8 145.801,16.8 146.601,16.8 147.401,16.8 187.001,16.8 187.801,16.8 188.601,16.8 189.401,16.8 190.201,16.8 191.001,16.8 191.801,16.8 192.601,16.8 193.401,16.8 194.201,16.8 187.401,17.6 188.201,17.6 189.001,17.6 189.801,17.6 190.601,17.6 191.401,17.6 192.201,17.6 193.001,17.6 193.801,17.6 12.6,23.2 40.6,23.2 41.4,23.2 13,24 41,24 41.8,24 12.6,24.8 13.4,24.8 14.2,24.8 15,24.8 15.8,24.8 16.6,24.8 17.4,24.8 18.2,24.8 40.6,24.8 41.4,24.8 42.2,24.8 43,24.8 43.8,24.8 44.6,24.8 45.4,24.8 46.2,24.8 13,25.6 13.8,25.6 14.6,25.6 15.4,25.6 16.2,25.6 17,25.6 17.8,25.6 41,25.6 41.8,25.6 42.6,25.6 43.4,25.6 44.2,25.6 45,25.6 45.8,25.6 46.6,25.6 12.6,26.4 13.4,26.4 14.2,26.4 15,26.4 15.8,26.4 16.6,26.4 17.4,26.4 18.2,26.4 40.6,26.4 41.4,26.4 42.2,26.4 43,26.4 43.8,26.4 44.6,26.4 45.4,26.4 46.2,26.4 13,27.2 13.8,27.2 14.6,27.2 15.4,27.2 16.2,27.2 17,27.2 17.8,27.2 41,27.2 41.8,27.2 42.6,27.2 43.4,27.2 44.2,27.2 45,27.2 45.8,27.2 46.6,27.2 13.4,28 14.2,28 15,28 15.8,28 16.6,28 17.4,28 18.2,28 42.2,28 43,28 43.8,28 44.6,28 45.4,28 46.2,28 13.8,28.8 14.6,28.8 15.4,28.8 16.2,28.8 17,28.8 17.8,28.8 41,28.8 41.8,28.8 42.6,28.8 43.4,28.8 44.2,28.8 45,28.8 45.8,28.8 46.6,28.8 12.6,29.6 13.4,29.6 14.2,29.6 15,29.6 15.8,29.6 16.6,29.6 17.4,29.6 18.2,29.6 40.6,29.6 41.4,29.6 42.2,29.6 43,29.6 43.8,29.6 44.6,29.6 45.4,29.6 46.2,29.6 92.2,29.6 93,29.6 138.6,29.6 139.4,29.6 140.2,29.6 91.5,29.675 185.861,29.811 184.975,30.2 186.9,30.35 13,30.4 13.8,30.4 14.6,30.4 15.4,30.4 16.2,30.4 17,30.4 17.8,30.4 41,30.4 41.8,30.4 42.6,30.4 43.4,30.4 44.2,30.4 45,30.4 45.8,30.4 46.6,30.4 12.6,31.2 13.4,31.2 14.2,31.2 15,31.2 15.8,31.2 16.6,31.2 17.4,31.2 18.2,31.2 40.6,31.2 41.4,31.2 42.2,31.2 43,31.2 43.8,31.2 44.6,31.2 45.4,31.2 46.2,31.2 13,32 13.8,32 14.6,32 15.4,32 16.2,32 17,32 17.8,32 30.2,32 31,32 41,32 41.8,32 59,32 59.8,32 12.6,32.8 30.6,32.8 40.6,32.8 41.4,32.8 59.4,32.8 58.784,32.825 30.2,33.6 31,33.6
GPIO2: J16.3 R1.2 | length 65.3
  Top Layer 1 w0.5: v1(63.4,78.9) 63.4,86.725 72.575,95.9 72.575,109.875 73.8,111.1 R1.2
  Layer 2 w0.5: J16.3 53.653,60 56.075,60 63.4,67.325 v1(63.4,78.9)
GPIO3: J16.5 R2.2 | length 48.7
  Top Layer 1 w0.5: J16.5@52.378,61.265 52.378,61.428 53.479,62.53 58.68,62.53 64.1,67.95 64.1,86.35 72.35,94.6 R2.2
GPIO4: J16.7 R3.2 | length 30
  Top Layer 1 w0.5: v1(72.023,77.248) 72.875,78.1 R3.2
  Bottom Layer w0.5: J16.7 53.648,65.075 59.85,65.075 v1(72.023,77.248)
GPIO5: J16.29 R4.2 | length 53.7
  Top Layer 1 w0.5: v1(68.175,89.1) 64.8,85.725 64.8,67.9 71.1,61.6 R4.2
  Layer 1 w0.5: J16.29 53.791,90.322 66.953,90.322 v1(68.175,89.1)
GPIO6: J16.31 R5.2 | length 63.7
  Top Layer 1 w0.5: v1(70.675,46.25) 72.325,44.6 R5.2
  Layer 2 w0.5: J16.31 53.506,93.147 56.402,93.147 64.125,85.424 64.125,52.8 v1(70.675,46.25)
GPIO7: J16.26 R6.2 | length 96.2
  Top Layer 1 w0.5: J16.26 62.26,86.66 71.825,96.225 71.825,113.075 78.75,120 106.025,120 115.675,110.35 R6.2
GPIO8: J16.24 R7.2 | length 72.9
  Top Layer 1 w0.5: v1(112.36,86.144) 120.816,94.6 R7.2
  Layer 1 w0.5: J16.24 60.476,84.12 62.5,86.144 v1(112.36,86.144)
GPIO9: J16.21 R8.2 | length 75.1
  Top Layer 1 w0.5: v1(117.497,78.1) R8.2
  Layer 1 w0.5: J16.21 52.373,81.352 53.259,80.466 56.909,80.466 62.179,75.196 114.593,75.196 v1(117.497,78.1)
GPIO10: J16.19 R9.2 | length 79.3
  Top Layer 1 w0.5: v1(120.816,61.6) R9.2
  Bottom Layer w0.5: J16.19 53.608,80.275 99.2,80.275 117.875,61.6 v1(120.816,61.6)
GPIO11: J16.23 R10.2 | length 103
  Top Layer 1 w0.5: v1(112.967,76.06) 112.967,50.483 118.85,44.6 R10.2
  Layer 1 w0.5: J16.23 53.487,83.006 62.819,83.006 64.802,81.023 109.018,81.023 112.967,77.073 v1(112.967,76.06)
GPIO12: J16.32 R11.2 | length 121.9
  Top Layer 1 w0.5: v1(166.206,107.708) 168.847,110.35 R11.2
  Bottom Layer w0.5: J16.32 58.708,98.075 156.572,98.075 v1(166.206,107.708)
GPIO13: J16.33 R12.2 | length 121.3
  Top Layer 1 w0.5: v1(164.453,93.078) 167.325,93.078 168.847,94.6 R12.2
  Layer 1 w0.5: J16.33 53.628,98.075 124.252,98.075 129.579,92.748 164.123,92.748 v1(164.453,93.078)
GPIO16: J16.36 R23.2 | length 124.1
  Top Layer 1 w0.5: v1(163.75,80.75) 166.4,78.1 R23.2
  Layer 2 w0.5: J16.36 56.64,99.36 70.458,85.542 158.958,85.542 v1(163.75,80.75)
GPIO17: R24.2
GPIO18: J16.12 R25.2 | length 134.3
  Top Layer 1 w0.5: v1(156.96,62.191) 156.96,48.425 160.785,44.6 R25.2
  Layer 1 w0.5: J16.12 56.033,70 149.152,70 v1(156.96,62.191)
GPIO19: J16.35
GPIO21: J16.40
GPIO22: J16.15
GPIO23: J16.16
GPIO24: J16.18
GPIO25: J16.22
GPIO26: J16.37
NetC3_1: C3.1 R13.2 R14.2 U2.4
NetC6_1: C6.1 R15.2 R16.2 U1.4
NetC11_1: C11.1 R17.2 R18.2 U3.4
NetC12_1: C12.1 R19.2 R20.2 U4.4
NetC15_1: C15.1 R21.2 R22.2 U5.4
NetD1_A: D1.A K1.A1 Q1.3 | length 11.7
  Top Layer 1 w0.5: Q1.3 79.4,112.26 80.035,112.895 D1.A 82.4,115.571 83.729,116.9 K1.A1
NetD2_A: D2.A K2.A1 Q2.3 | length 11.5
  Top Layer 1 w0.5: Q2.3 81.16,95.4 82.155,96.395 D2.A 82.4,99.061 83.739,100.4 K2.A1
NetD3_A: D3.A K3.A1 Q3.3 | length 11.7
  Top Layer 1 w0.5: Q3.3 81.16,78.9 82.155,79.895 D3.A 82.4,82.802 83.498,83.9 K3.A1
NetD4_A: D4.A K4.A1 Q4.3 | length 11.7
  Top Layer 1 w0.5: Q4.3 81.16,62.4 82.155,63.395 D4.A 82.4,66.295 83.505,67.4 K4.A1
NetD5_A: D5.A K5.A1 Q5.3 | length 11.4
  Top Layer 1 w0.5: Q5.3 81.16,45.4 82.155,46.395 D5.A 82.4,48.896 83.904,50.4 K5.A1
NetD6_A: D6.A K6.A1 Q6.3 | length 11.5
  Top Layer 1 w0.5: Q6.3 128.065,111.15 128.955,112.04 D6.A 129.2,114.619 131.481,116.9 K6.A1
NetD7_A: D7.A K7.A1 Q7.3 | length 10.9
  Top Layer 1 w0.5: Q7.3 127.96,95.4 128.955,96.395 D7.A 129.2,98.49 131.11,100.4 K7.A1
NetD8_A: D8.A K8.A1 Q8.3 | length 10.6
  Top Layer 1 w0.5: Q8.3 127.96,78.9 128.955,79.895 D8.A 129.2,81.472 131.628,83.9 K8.A1
NetD9_A: D9.A K9.A1 Q9.3 | length 10.9
  Top Layer 1 w0.5: Q9.3 127.96,62.4 128.955,63.395 D9.A 129.2,65.47 131.13,67.4 K9.A1
NetD10_A: D10.A K10.A1 Q10.3 | length 11.3
  Top Layer 1 w0.5: Q10.3 127.96,45.4 128.955,46.395 D10.A 129.452,46.647 129.452,49.339 130.513,50.4 K10.A1
NetD11_A: D11.A K11.A1 Q11.3 | length 12.1
  Top Layer 1 w0.5: Q11.3 174.815,111.15 175.705,112.04 D11.A 175.95,115.617 177.233,116.9 K11.A1
NetD12_A: D12.A K12.A1 Q12.3 | length 10.9
  Top Layer 1 w0.5: Q12.3 174.71,95.4 175.705,96.395 D12.A 175.95,98.377 177.973,100.4 K12.A1
NetD13_C: D13.C L1.1 U2.2
NetD14_C: D14.C L2.1 U1.2
NetD15_C: D15.C L3.1 U3.2
NetD16_C: D16.C L4.1 U4.2
NetD17_C: D17.C L5.1 U5.2
NetD18_A: D18.A K13.A1 Q13.3 | length 11
  Top Layer 1 w0.5: Q13.3 174.71,78.9 175.705,79.895 D18.A 175.95,82.121 177.729,83.9 K13.A1
NetD19_A: D19.A K14.A1 Q14.3 | length 11.5
  Top Layer 1 w0.5: Q14.3 174.71,62.4 175.705,63.395 D19.A 175.95,66.468 176.882,67.4 K14.A1
NetD20_A: D20.A K15.A1 Q15.3 | length 11.2
  Top Layer 1 w0.5: Q15.3 174.71,45.4 175.705,46.395 D20.A 175.95,48.974 177.376,50.4 K15.A1
NetJ1_01: J1.01 K1.COM | length 22.2
  Layer 1 w0.5: K1.COM 106.158,110.9 107.053,110.005 J1.01
NetJ2_01: J2.01 K2.COM | length 22.2
  Layer 1 w0.5: K2.COM 106.158,94.4 107.053,93.505 J2.01
NetJ3_01: J3.01 K3.COM | length 22.2
  Layer 1 w0.5: K3.COM 106.158,77.9 107.053,77.005 J3.01
NetJ4_01: J4.01 K4.COM | length 22.2
  Layer 1 w0.5: K4.COM 106.158,61.4 107.053,60.505 J4.01
NetJ5_01: J5.01 K5.COM | length 22.2
  Layer 1 w0.5: K5.COM 106.158,44.4 107.053,43.505 J5.01
NetJ6_01: J6.01 K6.COM | length 22.1
  Layer 1 w0.5: K6.COM 153.124,110.9 153.769,110.255 J6.01
NetJ7_01: J7.01 K7.COM | length 22.1
  Layer 1 w0.5: K7.COM 153.124,94.4 153.769,93.755 J7.01
NetJ8_01: J8.01 K8.COM | length 22.1
  Layer 1 w0.5: K8.COM 153.124,77.9 153.769,77.255 J8.01
NetJ9_01: J9.01 K9.COM | length 22.1
  Layer 1 w0.5: K9.COM 153.124,61.4 153.769,60.755 J9.01
NetJ10_01: J10.01 K10.COM | length 22.1
  Layer 1 w0.5: K10.COM 153.124,44.4 153.769,43.755 J10.01
NetJ11_01: J11.01 K11.COM | length 22.1
  Layer 1 w0.5: K11.COM 199.874,110.9 200.519,110.255 J11.01
NetJ12_01: J12.01 K12.COM | length 22.1
  Layer 1 w0.5: K12.COM 199.874,94.4 200.519,93.755 J12.01
NetJ13_01: J13.01 K13.COM | length 22.1
  Layer 1 w0.5: K13.COM 199.874,77.9 200.519,77.255 J13.01
NetJ14_01: J14.01 K14.COM | length 22.1
  Layer 1 w0.5: K14.COM 199.874,61.4 200.519,60.755 J14.01
NetJ15_01: J15.01 K15.COM | length 22.1
  Layer 1 w0.5: K15.COM 199.874,44.4 200.519,43.755 J15.01
NetQ1_1: Q1.1 R1.1 | length 2.2
  Top Layer 1 w0.5: R1.1 78.4,109.7 78.45,109.75 Q1.1
NetQ2_1: Q2.1 R2.1 | length 2.2
  Top Layer 1 w0.5: R2.1 78.4,93.2 78.45,93.25 Q2.1
NetQ3_1: Q3.1 R3.1 | length 2.2
  Top Layer 1 w0.5: R3.1 78.4,76.7 78.45,76.75 Q3.1
NetQ4_1: Q4.1 R4.1 | length 2.2
  Top Layer 1 w0.5: R4.1 78.4,60.2 78.45,60.25 Q4.1
NetQ5_1: Q5.1 R5.1 | length 2.2
  Top Layer 1 w0.5: R5.1 78.4,43.2 78.45,43.25 Q5.1
NetQ6_1: Q6.1 R6.1 | length 2.2
  Top Layer 1 w0.5: R6.1 125.45,108.95 125.5,109 Q6.1
NetQ7_1: Q7.1 R7.1 | length 2.2
  Top Layer 1 w0.5: R7.1 125.45,93.2 125.5,93.25 Q7.1
NetQ8_1: Q8.1 R8.1 | length 2.2
  Top Layer 1 w0.5: R8.1 125.45,76.7 125.5,76.75 Q8.1
NetQ9_1: Q9.1 R9.1 | length 2.2
  Top Layer 1 w0.5: R9.1 125.45,60.2 125.5,60.25 Q9.1
NetQ10_1: Q10.1 R10.1 | length 2.2
  Top Layer 1 w0.5: R10.1 125.45,43.2 125.5,43.25 Q10.1
NetQ11_1: Q11.1 R11.1 | length 2.2
  Top Layer 1 w0.5: R11.1 172.2,108.95 172.25,109 Q11.1
NetQ12_1: Q12.1 R12.1 | length 2.2
  Top Layer 1 w0.5: R12.1 172.2,93.2 172.25,93.25 Q12.1
NetQ13_1: Q13.1 R23.1 | length 2.2
  Top Layer 1 w0.5: R23.1 172.2,76.7 172.25,76.75 Q13.1
NetQ14_1: Q14.1 R24.1 | length 2.2
  Top Layer 1 w0.5: R24.1 172.2,60.2 172.25,60.25 Q14.1
NetQ15_1: Q15.1 R25.1 | length 2.2
  Top Layer 1 w0.5: R25.1 172.2,43.2 172.25,43.25 Q15.1
Vin: C1.1 C4.1 C7.1 C8.1 C13.1 J17.01 J18.01 J19.01 pad.7 U1.1 U2.1 U3.1 U4.1 U5.1
  other v1: 27.8,16 28.6,16 29.4,16 30.2,16 31,16 31.8,16 32.6,16 55.8,16 56.6,16 57.4,16 58.2,16 59,16 27.4,16.8 28.2,16.8 29,16.8 29.8,16.8 30.6,16.8 31.4,16.8 32.2,16.8 33,16.8 56.2,16.8 57,16.8 57.8,16.8 58.6,16.8 59.4,16.8 27.8,17.6 28.6,17.6 29.4,17.6 30.2,17.6 31,17.6 31.8,17.6 32.6,17.6 55.8,17.6 56.6,17.6 57.4,17.6 58.2,17.6 59,17.6 27.4,18.4 28.2,18.4 29,18.4 29.8,18.4 30.6,18.4 31.4,18.4 32.2,18.4 33,18.4 56.2,18.4 57,18.4 57.8,18.4 58.6,18.4 59.4,18.4 27.8,19.2 28.6,19.2 29.4,19.2 30.2,19.2 31,19.2 31.8,19.2 32.6,19.2 55.8,19.2 56.6,19.2 57.4,19.2 58.2,19.2 59,19.2 27.4,20 28.2,20 29,20 29.8,20 30.6,20 31.4,20 32.2,20 33,20 56.2,20 57,20 57.8,20 58.6,20 59.4,20 103.8,20 104.6,20 105.4,20 106.2,20 107,20 107.8,20 108.6,20 150.201,20 151.001,20 151.801,20 152.601,20 153.401,20 154.201,20 155.001,20 155.801,20 196.601,20 197.401,20 198.201,20 199.001,20 199.801,20 200.601,20 201.401,20 202.201,20 27.8,20.8 28.6,20.8 29.4,20.8 30.2,20.8 31,20.8 31.8,20.8 32.6,20.8 55.8,20.8 56.6,20.8 57.4,20.8 58.2,20.8 59,20.8 103.4,20.8 104.2,20.8 105,20.8 105.8,20.8 106.6,20.8 107.4,20.8 108.2,20.8 109,20.8 150.601,20.8 151.401,20.8 152.201,20.8 153.001,20.8 153.801,20.8 154.601,20.8 155.401,20.8 156.201,20.8 197.001,20.8 197.801,20.8 198.601,20.8 199.401,20.8 200.201,20.8 201.001,20.8 201.801,20.8 202.601,20.8 103.8,21.6 104.6,21.6 105.4,21.6 106.2,21.6 107,21.6 107.8,21.6 108.6,21.6 150.201,21.6 151.001,21.6 151.801,21.6 152.601,21.6 153.401,21.6 154.201,21.6 155.001,21.6 155.801,21.6 196.601,21.6 197.401,21.6 198.201,21.6 199.001,21.6 199.801,21.6 200.601,21.6 201.401,21.6 202.201,21.6 53.4,22.4 54.2,22.4 55,22.4 103.4,22.4 104.2,22.4 105,22.4 105.8,22.4 106.6,22.4 107.4,22.4 108.2,22.4 109,22.4 150.601,22.4 151.401,22.4 152.201,22.4 153.001,22.4 153.801,22.4 154.601,22.4 155.401,22.4 156.201,22.4 197.001,22.4 197.801,22.4 198.601,22.4 199.401,22.4 200.201,22.4 201.001,22.4 201.801,22.4 202.601,22.4 25,23.2 25.8,23.2 26.6,23.2 53.8,23.2 54.6,23.2 55.4,23.2 103.8,23.2 104.6,23.2 105.4,23.2 106.2,23.2 107,23.2 107.8,23.2 108.6,23.2 150.201,23.2 151.001,23.2 151.801,23.2 152.601,23.2 153.401,23.2 154.201,23.2 155.001,23.2 155.801,23.2 196.601,23.2 197.401,23.2 198.201,23.2 199.001,23.2 199.801,23.2 200.601,23.2 201.401,23.2 202.201,23.2 24.6,24 25.4,24 26.2,24 27,24 101.8,24 148.201,24 149.001,24 195.401,24 101.4,24.8 102.2,24.8 148.601,24.8 195.001,24.8 195.801,24.8 101.8,25.6 148.201,25.6 149.001,25.6 195.401,25.6
Vout_1_5V: C2.1 C3.2 J16.2 J16.4 L1.2 R14.1 | length 51
  Top Layer 1 w2: C2.1 39.118,39.618 45,45.5 58.078,45.5 59.25,46.672 59.25,51.843 J16.2 J16.4
Vout_1_7V: C9.1 C11.2 K1.NC K2.NC K3.NC K4.NC K5.NC L3.2 R18.1
Vout_2_5V: C5.1 C6.2 D1.C D2.C D3.C D4.C D5.C D6.C D7.C D8.C D9.C D10.C D11.C D12.C D18.C D19.C D20.C K1.A2 K2.A2 K3.A2 K4.A2 K5.A2 K6.A2 K7.A2 K8.A2 K9.A2 K10.A2 K11.A2 K12.A2 K13.A2 K14.A2 K15.A2 L2.2 R16.1 | length 488.4
  Top Layer 1 w0.5: 82.15,39.15 82.4,39.4 ; D5.C 82.4,41.032 84.282,39.15 ; D4.C 82.4,57.148 84.148,55.4 K4.A2 ; D3.C 82.4,74.039 84.539,71.9 K3.A2 ; D2.C 82.4,89.914 83.914,88.4 K2.A2 ; D1.C 82.4,106.805 84.305,104.9 K1.A2 ; D10.C 129.2,40.447 131.247,38.4 K10.A2 ; D9.C 129.2,57.338 131.138,55.4 K9.A2 ; D8.C 129.2,73.594 130.894,71.9 K8.A2 ; D7.C 129.2,90.485 131.285,88.4 K7.A2 ; D6.C 129.2,106.614 130.914,104.9 K6.A2 ; D20.C 175.95,39.671 177.221,38.4 K15.A2 ; D19.C 175.95,57.197 177.747,55.4 K14.A2 ; D18.C 175.95,73.961 178.011,71.9 K13.A2 ; D12.C 175.95,90.471 178.021,88.4 K12.A2 ; D11.C 175.95,106.473 177.523,104.9 K11.A2
  Top Layer 1 w2: C5.1 82.15,39.15 84.282,39.15 86.415,39.15 87.165,38.4 K5.A2 90.5,41.6 90.5,52.2 K4.A2 90.5,58.6 90.5,68.7 K3.A2 87.751,71.9 90.555,74.704 90.555,85.145 K2.A2 90.5,91.6 90.5,101.7 K1.A2 ; K10.A2 137.25,41.55 137.25,52.25 K9.A2 137.25,58.55 137.25,62.66 137.25,68.75 K8.A2 137.25,75.05 137.25,85.25 K7.A2 137.622,91.922 137.622,101.378 K6.A2 ; K15.A2 184,41.55 184,52.25 K14.A2 184.485,59.036 184.485,68.474 181.059,71.9 K13.A2 184,75.05 184,85.25 K12.A2 184,91.55 184,101.75 K11.A2
  Layer 1 w2: K5.A2 90.7,35 130.7,35 K10.A2 137.5,35 177.45,35 K15.A2
Vout_2_7V: C10.1 C12.2 K6.NC K7.NC K8.NC K9.NC K10.NC L4.2 R20.1
Vout_3_7V: C14.1 C15.2 K11.NC K12.NC K13.NC K14.NC K15.NC L5.2 R22.1
pads on no net: J16.1 J16.8 J16.10 J16.11 J16.13 J16.17 J16.27 J16.28 J16.41 J16.42 J16.43 J16.44 J16.S1 J16.S2 J16.S3 J16.S4 K1.NO K2.NO K3.NO K4.NO K5.NO K6.NO K7.NO K8.NO K9.NO K10.NO K11.NO K12.NO K13.NO K14.NO K15.NO

## Polygon pours and split planes (outlines as drawn)
GND on Top Layer 1 "GND_L01_P152" (solid, pour order 152): -0.025,124.757 -0.025,0 219.975,0 219.975,125.009
GND on Top Layer 1 "GND_L01_P146" (solid, pour order 146): 0,124.757 0,0 220,0 220,125.009
NetD14_C on Top Layer 1 "NETD14_C_L01_P106" (solid, pour order 106): 52.6,25.4 58.1,25.4 58.1,22.15 61.1,22.15 61.1,27.65 55.85,27.65 55.85,26.9 52.6,26.9
Vout_2_5V on Top Layer 1 "VOUT_2_5V_L01_P111" (solid, pour order 111): 51.35,40.65 65.35,40.65 65.35,22.15 62.6,22.15 62.6,28.4 57.6,28.4 57.6,30.9 60.35,30.9 60.35,33.9 57.6,33.9 57.6,34.4 57.6,37.65 51.35,37.65
Vout_2_7V on Top Layer 1 "VOUT_2_7V_L01_P112" (solid, pour order 112): 130.95,21.65 130.95,36.15 131.45,36.15 149.45,36.15 149.45,33.4 143.2,33.4 143.2,28.15 140.7,28.15 140.7,30.67 137.7,30.67 137.7,28.15 134.2,28.15 134.2,21.65
Vout_3_7V on Top Layer 1 "VOUT_3_7V_L01_P113" (solid, pour order 113): 177.95,21.9 177.95,36.15 196.2,36.15 196.2,33.4 189.95,33.4 189.95,28.4 189.7,28.4 187.45,28.4 187.45,30.9 184.45,30.9 184.45,28.4 180.7,28.4 180.7,21.9
NetD15_C on Top Layer 1 "NETD15_C_L01_P116" (solid, pour order 116): 99.4,23.4 99.4,29.15 102.65,29.15 102.65,31.9 97.15,31.9 97.15,26.65 97.9,26.65 97.9,23.4
NetC11_1 on Top Layer 1 "NETC11_1_L01_P117" (solid, pour order 117): 95.9,23.4 95.9,26.65 96.4,26.65 96.4,27.9 88.4,27.9 88.4,26.65 94.4,26.65 94.4,23.4
Vout_1_7V on Top Layer 1 "VOUT_1_7V_L01_P119" (solid, pour order 119): 84.4,21.9 84.4,36.15 102.65,36.15 102.65,33.4 96.4,33.4 96.4,28.15 93.9,28.15 93.9,30.65 90.9,30.65 90.9,28.15 86.9,28.15 86.9,21.9
Vout_1_5V on Top Layer 1 "VOUT_1_5V_L01_P123" (solid, pour order 123): 22.735,40.868 36.985,40.868 36.985,22.368 34.235,22.368 34.235,28.618 28.985,28.618 28.985,31.118 31.735,31.118 31.735,34.118 28.985,34.118 28.985,38.368 22.735,38.368
Vout_1_7V on Top Layer 1 "VOUT_1_7V_L01_P126" (solid, pour order 126): 102.65,33.4 102.65,118.9 95.4,118.9 95.4,33.4
Vin on Top Layer 1 "VIN_L01_P140" (solid, pour order 140): 203.2,26.65 203.2,19.367 196.356,19.367 196.356,26.657
Vin on Top Layer 1 "VIN_L01_P139" (solid, pour order 139): 156.45,26.4 156.45,19.15 149.65,19.15 149.65,26.4
Vin on Top Layer 1 "VIN_L01_P136" (solid, pour order 136): 109.65,26.4 109.65,19.15 103.15,19.15 103.15,26.4
Vin on Top Layer 1 "VIN_L01_P135" (solid, pour order 135): 52.6,15.15 59.85,15.15 59.85,21.15 52.6,21.15
Vin on Top Layer 1 "VIN_L01_P133" (solid, pour order 133): 24.235,15.368 33.485,15.368 33.485,21.368 24.235,21.368
Vin on Top Layer 1 "VIN_L01_P129" (solid, pour order 129): 72.65,29.15 72.65,13.4 77.9,13.4 77.9,29.15
Vout_3_7V on Top Layer 1 "VOUT_3_7V_L01_P128" (solid, pour order 128): 196.2,33.4 196.15,33.45 196.15,118.9 189.65,118.9 189.65,33.45
Vout_2_7V on Top Layer 1 "VOUT_2_7V_L01_P127" (solid, pour order 127): 149.45,33.4 149.45,118.85 149.4,118.9 143.15,118.9 143.15,33.4
NetC12_1 on Top Layer 1 "NETC12_1_L01_P102" (solid, pour order 102): 142.7,23.4 142.7,26.4 143.2,26.4 143.2,27.9 135.2,27.9 135.2,26.65 141.2,26.65 141.2,23.4
NetD16_C on Top Layer 1 "NETD16_C_L01_P107" (solid, pour order 107): 146.2,23.4 146.2,29.15 149.45,29.15 149.45,32.15 143.95,32.15 143.95,26.65 144.7,26.65 144.7,23.4
Vin on Top Layer 1 "VIN_L01_P108" (solid, pour order 108): 146.45,26.4 156.45,26.4 156.45,23.4 146.45,23.4
Vin on Top Layer 1 "VIN_L01_P114" (solid, pour order 114): 109.65,23.4 99.65,23.4 99.65,26.4 109.65,26.4
NetC3_1 on Top Layer 1 "NETC3_1_L01_P122" (solid, pour order 122): 24.235,29.118 27.485,29.118 27.485,28.618 28.735,28.618 28.735,36.868 27.485,36.868 27.485,30.868 24.235,30.868
NetD13_C on Top Layer 1 "NETD13_C_L01_P121" (solid, pour order 121): 24.235,25.868 29.985,25.868 29.985,22.368 32.735,22.368 32.735,27.868 32.485,28.118 27.485,28.118 27.485,27.368 24.235,27.368
Vin on Top Layer 1 "VIN_L01_P120" (solid, pour order 120): 24.235,15.368 24.235,25.618 27.485,25.618 27.485,15.368
NetC15_1 on Top Layer 1 "NETC15_1_L01_P103" (solid, pour order 103): 189.45,23.4 189.45,26.65 189.95,26.65 189.95,28.15 181.7,28.15 181.7,26.9 187.7,26.9 187.95,26.65 187.95,23.4
NetD17_C on Top Layer 1 "NETD17_C_L01_P105" (solid, pour order 105): 192.95,23.4 192.95,29.15 196.2,29.15 196.2,31.9 190.7,31.9 190.7,26.65 191.45,26.65 191.45,23.4
Vin on Top Layer 1 "VIN_L01_P109" (solid, pour order 109): 203.2,23.4 193.2,23.4 193.2,26.65 203.2,26.65
NetC6_1 on Top Layer 1 "NETC6_1_L01_P104" (solid, pour order 104): 52.6,28.9 55.85,28.9 55.85,28.4 57.35,28.4 57.35,36.4 55.85,36.4 55.85,30.4 52.6,30.4
Vin on Top Layer 1 "VIN_L01_P110" (solid, pour order 110): 52.6,15.15 52.6,25.15 55.85,25.15 55.85,15.15
GND on Bottom Layer "GND_L04_P150" (solid, pour order 150): -0.025,124.757 -0.025,0 219.975,0 219.975,125.009
Vin on Layer 1 "VIN_L02_P132" (solid, pour order 132): 13.4,35.3 13.4,8.4 14.4,8.4 208.4,8.4 208.4,28.95 35.4,28.95 35.4,35.3

## Keep-outs
Keep-Out Layer:
  the board outline again, w0.254

## Other copper
Layer 1:
  pour cut-out: 184.56,30.79 184.555,30.785 184.555,28.337 184.631,28.26 187.269,28.26 187.269,28.31 187.345,28.387 187.34,28.392 187.34,30.79
  pour cut-out: 137.81,30.56 137.81,28.142 137.805,28.137 137.881,28.06 137.881,28.01 140.519,28.01 140.59,28.081 140.59,30.56
  pour cut-out: 91.01,30.54 91.005,30.535 91.005,28.087 91.081,28.01 93.719,28.01 93.719,28.079 93.79,28.15 93.79,30.54
  pour cut-out: 31.625,34.008 31.625,31.228 28.985,31.228 28.914,31.299 28.845,31.299 28.845,33.937 28.916,34.008 28.985,34.008
  pour cut-out: 91.5,12.89 91.5,10.98 102.3,10.98 102.3,12.89 101.065,12.89 101.065,17.97 92.735,17.97 92.735,12.89
  pour cut-out: 11.815,33.718 13.725,33.718 13.725,32.483 18.805,32.483 18.805,24.153 13.725,24.153 13.725,22.918 11.815,22.918
  pour cut-out: 40.225,33.3 40.225,22.5 42.135,22.5 42.135,23.735 47.215,23.735 47.215,32.065 42.135,32.065 42.135,33.3
  pour cut-out: 186.285,18.015 194.615,18.015 194.615,12.935 195.85,12.935 195.85,11.025 185.05,11.025 185.05,12.935 186.285,12.935
  pour cut-out: 149.111,10.89 149.111,12.8 147.876,12.8 147.876,17.88 139.546,17.88 139.546,12.8 138.311,12.8 138.311,10.89

## Silkscreen, mask and mechanical layers (free items; w line width, h text height)
Top Overlay:
  text "Relay 6 / GPIO 7" at 158.027,109.41 h1.52 r90
  text "Relay 1 / GPIO 2" at 111.164,109.029 h1.52 r90
  text "Relay 11 / GPIO 12" at 204.763,109.029 h1.52 r90
  text "Relay 7 / GPIO 8" at 157.9,92.9 h1.52 r90
  text "Relay 2 / GPIO 3" at 111.164,92.646 h1.52 r90
  text "Relay 12 / GPIO 13" at 205.017,92.392 h1.52 r90
  text "Relay 8 / GPIO 9" at 157.9,76.39 h1.52 r90
  text "Relay 3 / GPIO 4" at 111.164,76.009 h1.52 r90
  text "Relay 13 / GPIO 16" at 204.763,76.009 h1.52 r90
  text "Relay 4 / GPIO 5" at 111.291,59.499 h1.52 r90
  text "Relay 9 / GPIO 10" at 158.027,59.372 h1.52 r90
  text "Relay 14 / GPIO 17" at 204.89,59.372 h1.52 r90
  text "Relay 5 / GPIO 6" at 111.291,42.608 h1.52 r90
  text "Relay 10 / GPIO 11" at 158.027,42.354 h1.52 r90
  text "Relay 15 / GPIO 18" at 204.89,42.354 h1.52 r90
  text "+" at 77.429,14.85 h1.52
  text "-" at 66.779,14.667 h1.52
  text "Projekt Getränkespender / Kilian Pfeifer , Valentin Ulm" at 153,2.5 h3